# Altium PCB Developer_GT06_Sheet_V1.1.0_Nov2023.PcbDoc
Units mm, origin at the board's own origin, x right, y up, seen from the top; angles counter-clockwise.
Board outline 218.31 x 98.27 mm, 2 copper layers (Top Layer, Bottom Layer); 15 components, 0 nets, 38 pads, 0 vias.
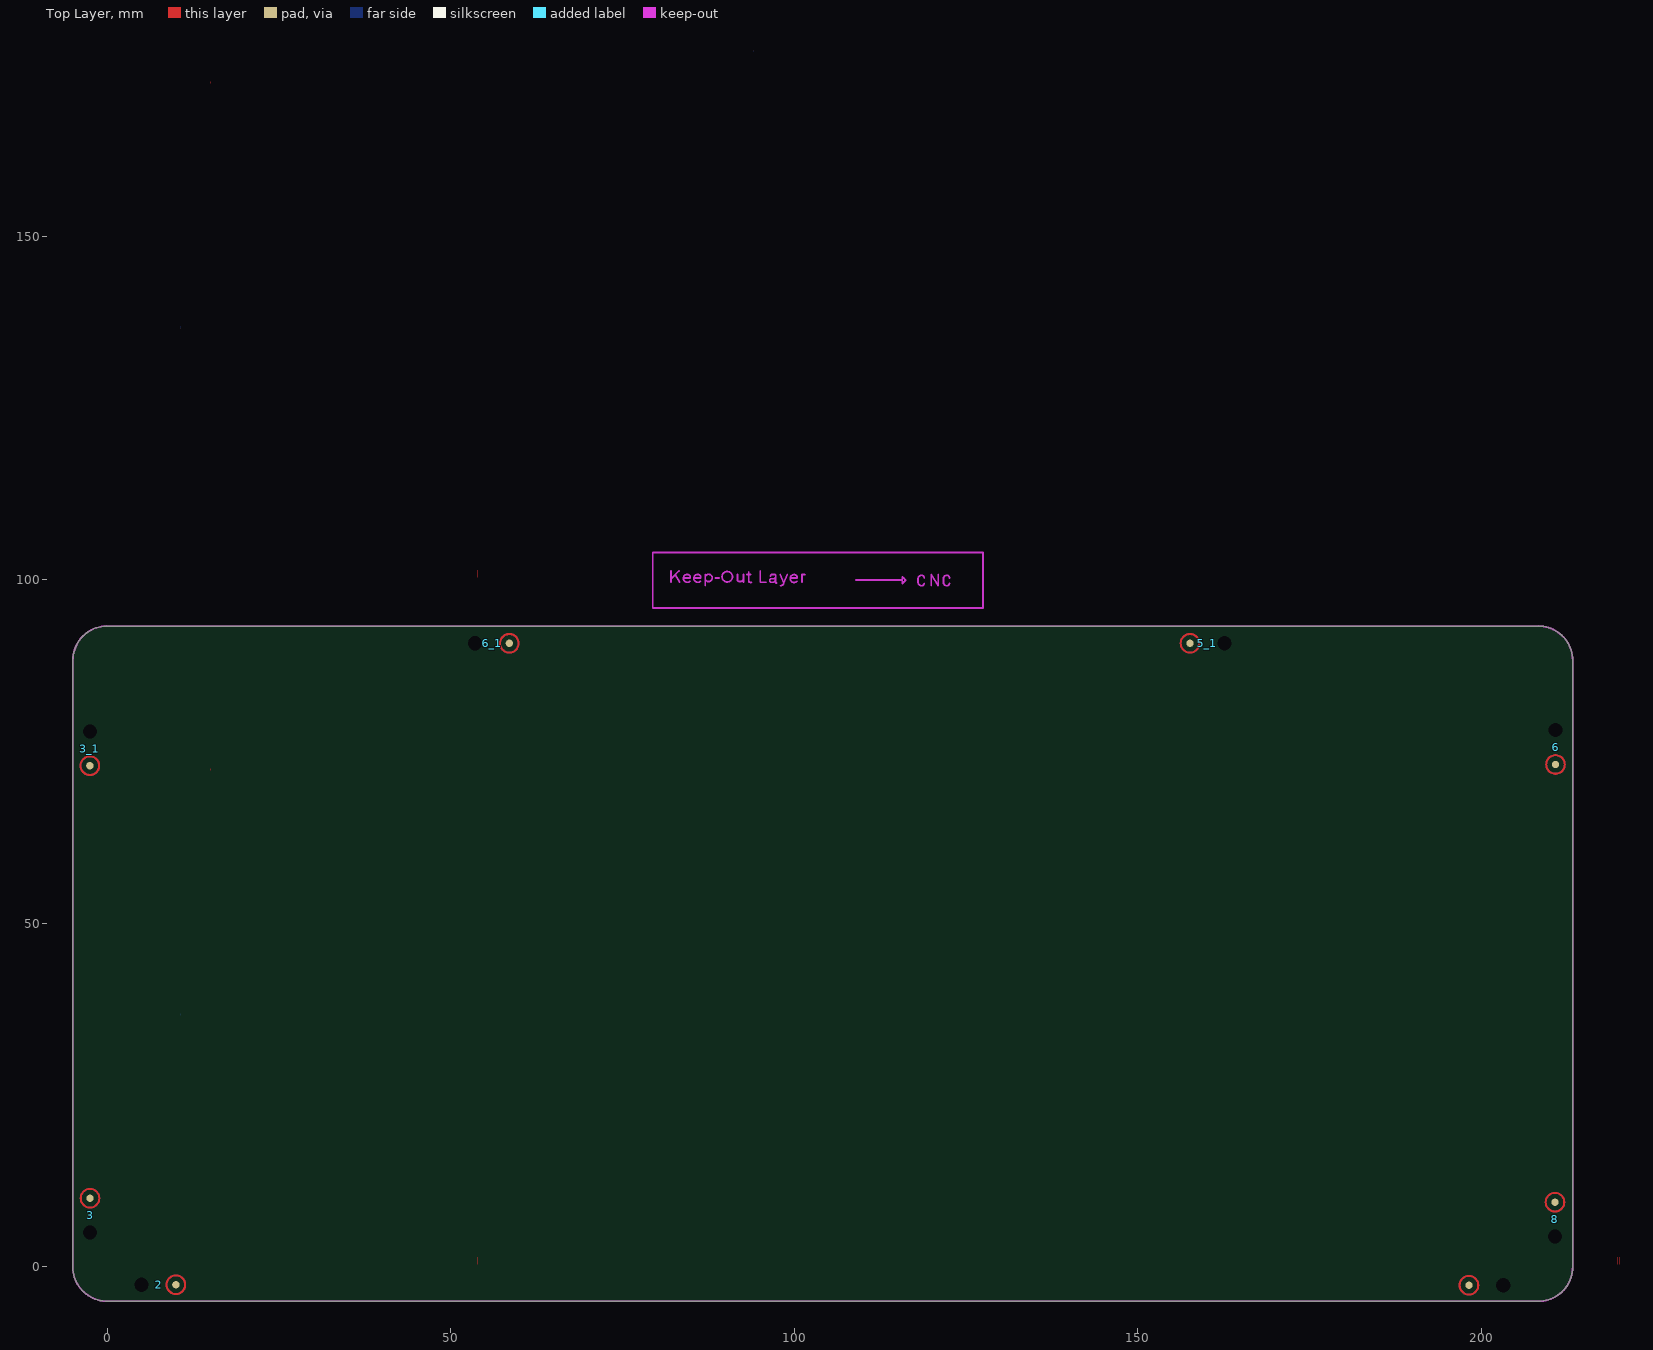
[diagram p0: Top Layer view]
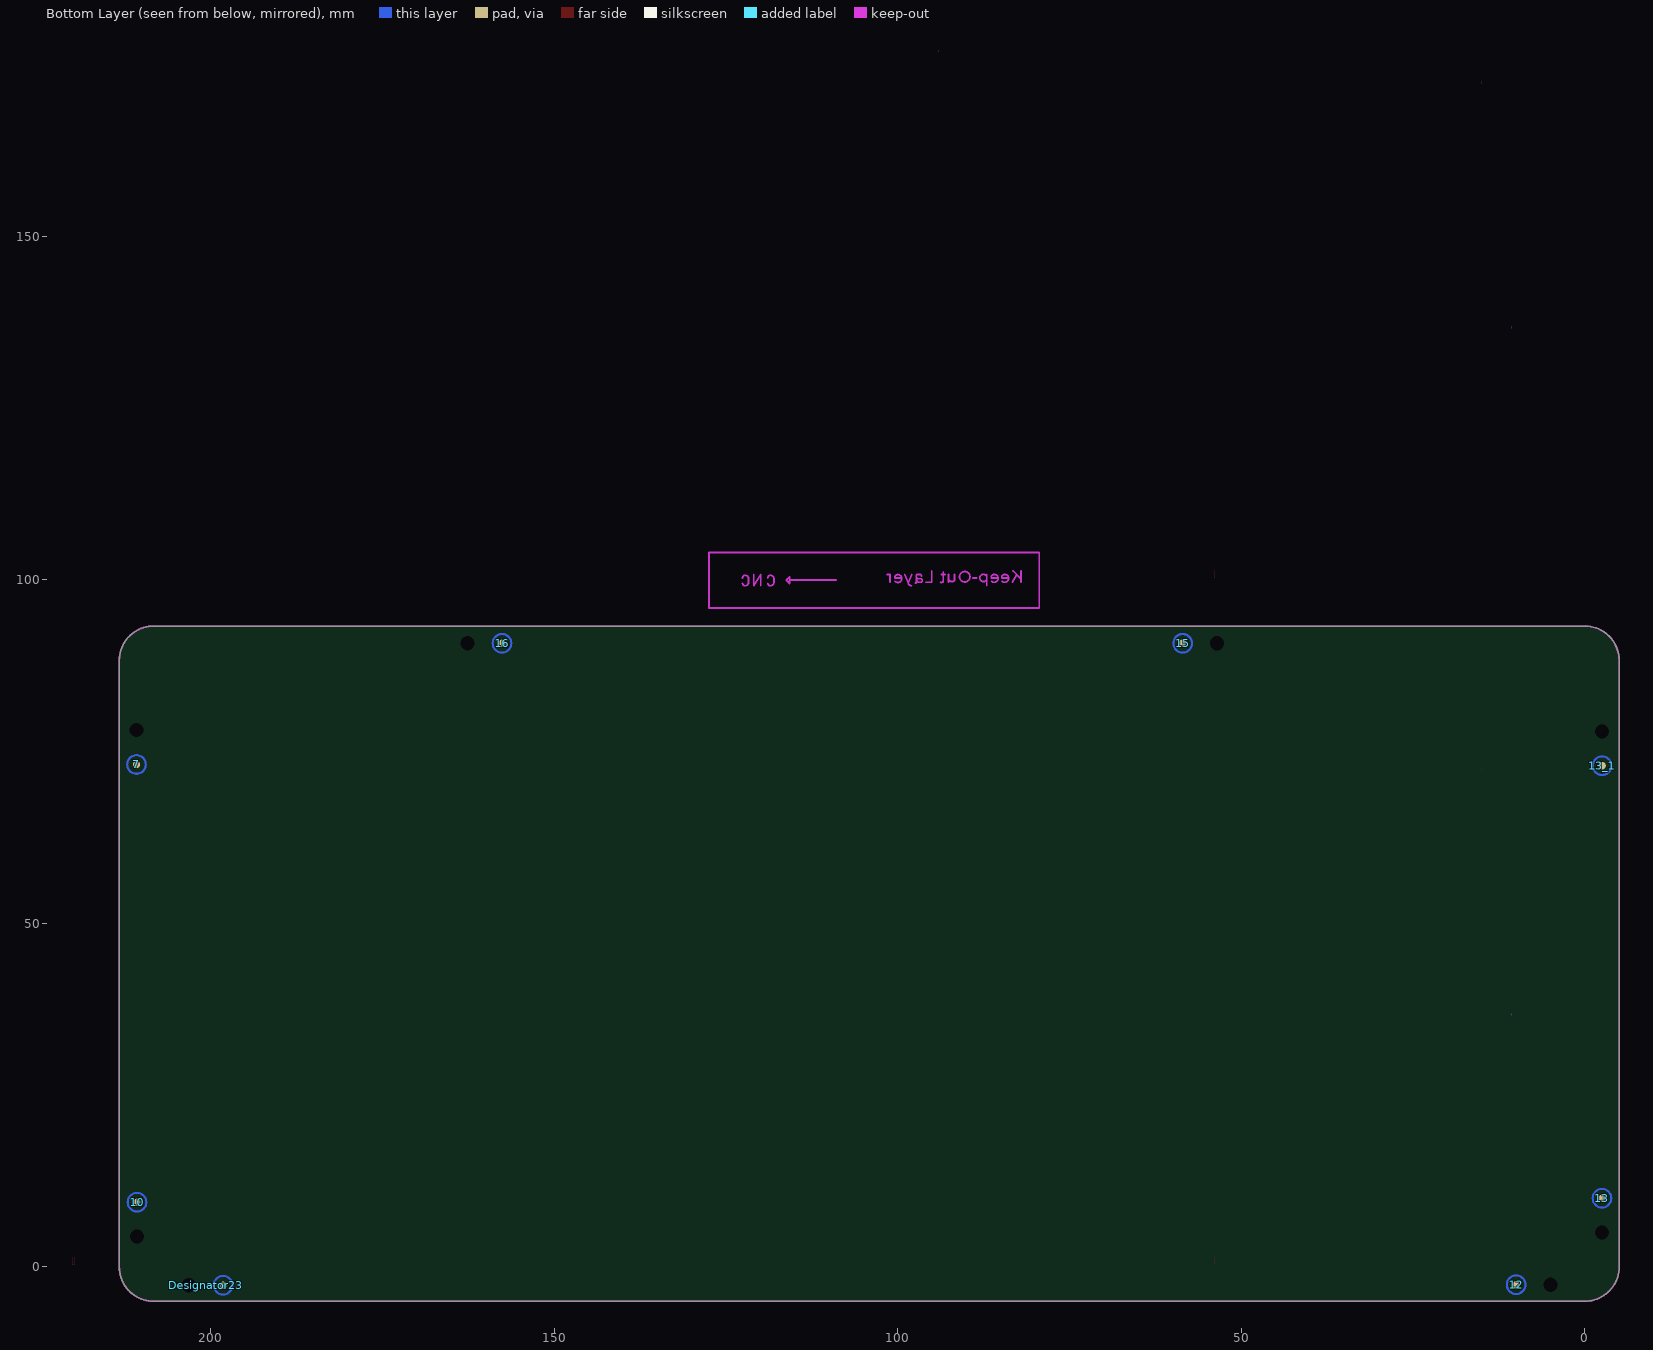
[diagram p1: Bottom Layer view, seen from below]

## Layer stack, top to bottom
Top Solder: solder mask 0.0102, Solder Resist, Dk 3.5
Top Layer: signal copper 0.0356
Dielectric 1: dielectric 0.32, FR-4, Dk 4.8
Bottom Layer: signal copper 0.0356
Bottom Solder: solder mask 0.0102, Solder Resist, Dk 3.5

## Board outline
-5.024,0 -5.014,88.265 -5,88.281 cw(c0,88.266) -0.084,93.266 -0.084,93.257 208.28,93.261 208.28,93.267 cw(c208.28,88.266) 213.281,88.265 213.282,88.266 213.276,0 213.281,0 cw(c208.28,0.001) 208.28,-4.999 208.28,-5 0.092,-5 cw(c0.034,0.058)

## Design rules (kind name [scope] priority, off if disabled: settings)
Clearance [All] p1: gap=0.254 ignorepadtopadclearanceinfootprint=FALSE except(0: Arc-Hole Track-Hole SMDPad-Hole THPad-Hole Via-Hole Fill-Hole Poly-Hole Region-Hole Text-Hole)
PolygonConnect [All] p1: connectstyle=Relief reliefconductorwidth=0.254 reliefentries=4 polygonreliefangle="90 Angle" airgapwidth=0.254
RoutingVias [All] p1: holewidth=0.711 width=1.27 viastyle="Through Hole" minholewidth=0.711 minwidth=1.27 maxholewidth=0.711 maxwidth=1.27
SolderMaskExpansion [All] p1: expansion=0.102 istentingtop=FALSE
Width [All] p1: maxlimit=0.254 minlimit=0.254 preferedwidth=0.254
30 further rules are at their usual default settings.

## Components (designator, comment, footprint, x,y, rotation, side; value= is the part's Value field where it differs from the comment)
2 "Comment" Sheet_point#1 7.455,-2.587 r270 top
3 "Comment" Sheet_point#1 -2.501,7.46 r0 top
3_1 "Comment" Sheet_point#1 -2.522,75.487 r180 top
5_1 "Comment" Sheet_point#1 160.122,90.763 r90 top
6 "Comment" Sheet_point#1 210.776,75.665 r180 top
6_1 "Comment" Sheet_point#1 55.982,90.763 r270 top
7 "Comment" Sheet_point#2 210.776,75.665 r0 bottom
8 "Comment" Sheet_point#1 210.7,6.882 r0 top
10 "Comment" Sheet_point#2 210.7,11.962 r0 bottom
12 "Comment" Sheet_point#2 9.995,-0.047 r0 bottom
13 "Comment" Sheet_point#2 -2.501,12.54 r0 bottom
13_1 "Comment" Sheet_point#2 -2.522,70.407 r180 bottom
15 "Comment" Sheet_point#2 58.522,93.303 r0 bottom
16 "Comment" Sheet_point#2 157.582,93.303 r0 bottom
Designator23 "Comment" Sheet_Set-Point 200.678,-2.664 r270 bottom

## Footprints (in the part's own frame and the unit in brackets; to place one, negate y for a bottom-side part, rotate by r counter-clockwise, add the part's x,y. Pads: shape width x height; smd on the part's side, far side on the other; paste and mask are expansions set on the pad)
Sheet_point#1 [mm]
  round 1.068 smd mask+0.102: 0(0,2.54)
  round 2.5 on Top Solder: 0(0,2.54)
  round 2.5 on Bottom Solder: 0(0,2.54)
  round 0 hole 2.05 paste-1.279 mask-0.152: 1(0,-2.46)
  Top Layer circle w0.3: c0,2.54 r1.353
Sheet_point#2 [mm]
  round 1.068 smd mask+0.102: 0(0,2.54)
  Top Layer circle w0.3: c0,2.54 r1.353
Sheet_Set-Point [mm]
  round 1.068 smd far side mask+0.65: 0(0,2.5)
  round 1.068 smd mask+0.65: 0(0,2.5)
  round 0 hole 2.05 paste-1.279 mask-0.152: 1(0,-2.5)
  Top Layer circle w0.3: c0,2.5 r1.353
  Bottom Layer circle w0.3: c0,2.5 r1.353

## Nets (pads, with @x,y where several pads share a name; then routed paths per layer and width w, separated by ;. In a path a pad name is that pad's centre, name@x,y a point inside that pad or via, vN(x,y) a via of type N, cw(c..) or ccw(c..) an arc to the next point about the centre after c; other vN are vias at no path point)
pads on no net: 2.0 2.1 3.0 3.1 3_1.0 3_1.1 5_1.0 5_1.1 6.0 6.1 6_1.0 6_1.1 7.0 8.0 8.1 10.0 12.0 13.0 13_1.0 15.0 16.0 Designator23.0 Designator23.1

## Keep-outs
Keep-Out Layer:
  circle w0.254: c90.243,100.448 r0.762
  rectangle: 115.722,99.771 116.049,100.211
  lines w0.254: -5.014,88.265 -5.024,0 ccw(c0.034,0.058) 0.092,-5 208.28,-5 ; -5,88.281 cw(c0,88.266) -0.084,93.266 ; -0.084,93.257 208.28,93.261 ; 82.067,101.295 82.067,99.644 82.067,100.169 83.21,101.295 82.639,100.732 83.337,99.644 ; 84.823,99.809 cw(c84.417,100.216) 83.845,100.279 ; 86.347,99.809 cw(c85.941,100.216) 85.369,100.279 ; 87.02,99.136 87.02,100.787 ; 87.02,100.152 ccw(c87.533,100.275) 87.02,100.398 ; 88.544,100.279 89.052,100.279 ; 91.719,100.787 91.719,99.898 ccw(c92.1,100.279) 92.608,100.1 ; 92.608,99.644 92.608,100.787 ; 93.116,100.787 93.624,100.787 ; 93.37,101.168 93.37,99.771 ccw(c93.624,99.898) 93.751,99.644 ; 95.021,101.295 95.021,99.644 95.91,99.644 ; 96.545,100.533 cw(c96.799,100.533) 96.799,100.787 97.053,100.787 cw(c97.053,100.533) 97.307,100.533 ; 97.244,100.046 cw(c96.842,100.046) 96.842,99.644 96.672,99.644 cw(c96.672,99.898) 96.418,99.898 cw(c96.672,99.898) 96.672,100.152 96.926,100.152 ccw(c96.926,100.533) 97.307,100.533 ; 97.434,99.517 cw(c97.434,99.644) 97.307,99.644 97.307,100.533 ; 97.942,100.787 98.45,99.517 ; 97.964,99.136 ccw(c97.964,99.697) 98.361,99.3 ccw(c98.144,99.517) 98.45,99.517 ; 98.958,100.787 98.45,99.517 ; 100.378,99.779 cw(c99.971,100.185) 99.4,100.249 ; 101.117,99.644 101.117,100.787 ; 101.117,100.507 cw(c101.397,100.507) 101.574,100.724 ; 108.991,99.957 115.722,99.957 115.722,100.465 ; 118.897,99.517 cw(c118.516,99.517) 118.516,99.136 cw(c118.516,99.644) 118.008,99.644 118.008,100.152 cw(c118.516,100.152) 118.516,100.66 cw(c118.516,100.279) 118.897,100.279 ; 119.913,99.136 119.913,100.787 120.929,99.136 120.929,100.787 ; 122.58,99.517 cw(c122.199,99.517) 122.199,99.136 cw(c122.199,99.644) 121.691,99.644 121.691,100.152 cw(c122.199,100.152) 122.199,100.66 cw(c122.199,100.279) 122.58,100.279 ; 208.28,-4.999 ccw(c208.28,0.001) 213.281,0 ; 208.28,93.267 cw(c208.28,88.266) 213.281,88.265 ; 213.276,0 213.282,88.266 ; 83.845,100.279 cw(c84.417,100.216) 84.48,100.787 cw(c84.417,100.343) 84.861,100.279 83.845,100.279 ; 85.369,100.279 cw(c85.941,100.216) 86.004,100.787 cw(c85.941,100.343) 86.385,100.279 85.369,100.279 ; 99.4,100.249 cw(c99.971,100.185) 100.035,100.757 cw(c99.971,100.312) 100.416,100.249 99.4,100.249 ; 115.722,100.465 115.722,99.449 116.23,99.957 115.722,100.465 ; 79.4,95.893 79.4,103.962 127.455,103.962 127.455,95.893 79.4,95.893

## Silkscreen, mask and mechanical layers (free items; w line width, h text height)
Top Overlay:
Bottom Overlay:
Mechanical 15:
  rectangle: 115.926,108.156 116.108,108.643
  lines w0.254: -5.024,0 213.291,0 ; -4.883,17.653 213.277,17.653 ; -4.883,35.306 213.278,35.306 ; -4.883,52.959 213.279,52.959 ; -4.883,70.612 213.28,70.612 ; -4.883,88.265 213.282,88.265 ; 0,-5 0,93.257 ; 41.656,-5.001 41.656,93.259 ; 83.312,-5.001 83.312,93.259 ; 109.123,108.389 116.362,108.389 ; 124.968,-5.001 124.968,93.259 ; 166.624,-5 166.624,93.259 ; 208.28,-5.001 208.28,93.267 ; 116.362,108.389 115.854,107.881 115.854,108.897 116.362,108.389 ; 79.401,104.394 127.455,104.394 127.455,112.463 79.401,112.463 79.401,104.394
  text "Mechanical 15 Layer" at 81.989,107.939 h3
  text "V-Cut" at 117.93,107.406 h3

## Panel: embedded boards
"Developer_GT06_Output_V1.1.0_Nov2023_1402.06.05.PcbDoc" at 0,0, 5 rows x 5 columns, spacing 17.653 x 41.656, rotation 0